# Altium PCB Hub.PcbDoc
Units mil, origin at the board's own origin, x right, y up, seen from the top; angles counter-clockwise.
Board outline 6000 x 4000 mil, 2 copper layers (Top Layer, Bottom Layer); 63 components, 68 nets, 322 pads, 0 vias.
Unrouted connection lines stored in the file: 121.
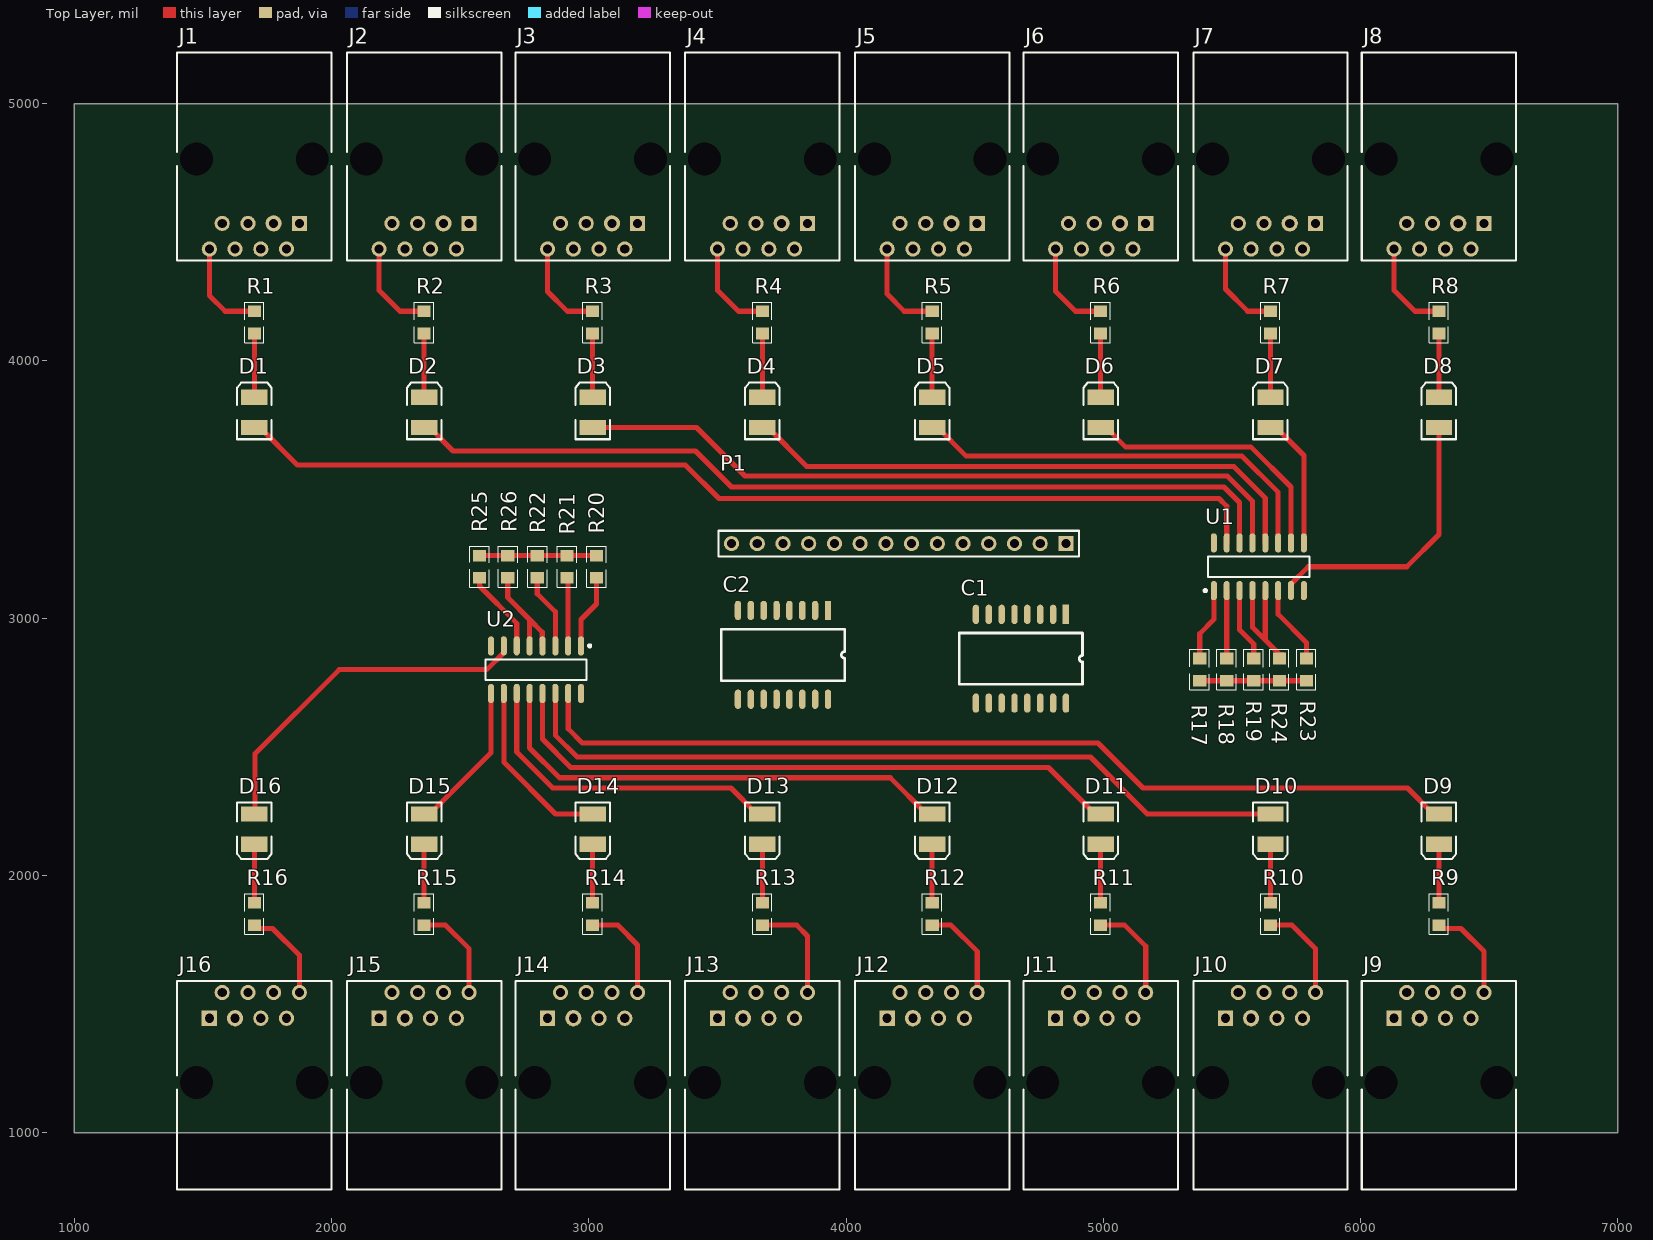
[diagram p0: Top Layer view]
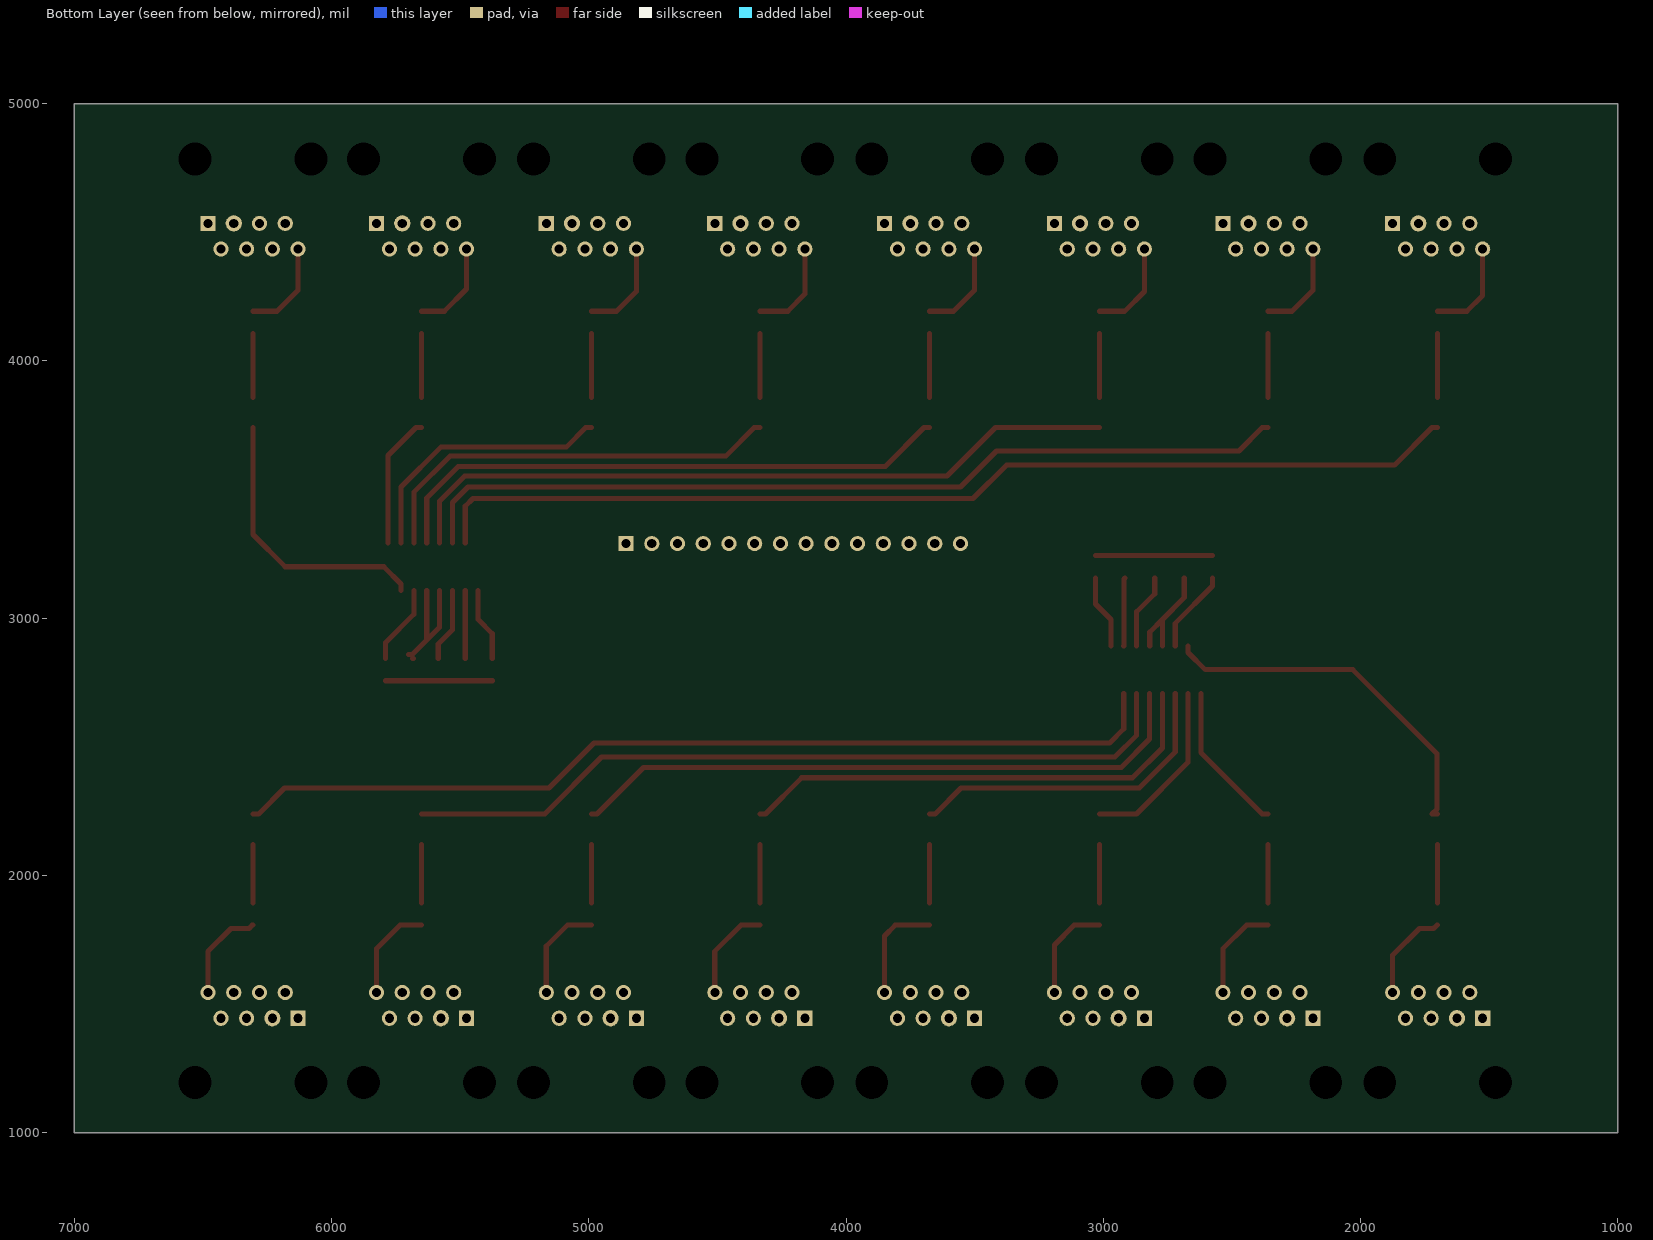
[diagram p1: Bottom Layer view, seen from below]

## Layer stack, top to bottom
Top Solder: solder mask 0.4, Solder Resist, Dk 3.5
Top Layer: signal copper 1.4
Dielectric 1: dielectric 12.6, FR-4, Dk 4.8
Bottom Layer: signal copper 1.4
Bottom Solder: solder mask 0.4, Solder Resist, Dk 3.5

## Board outline
1000,1000 7000,1000 7000,5000 1000,5000

## Design rules (kind name [scope] priority, off if disabled: settings)
Clearance [All] p1: gap=10 ignorepadtopadclearanceinfootprint=FALSE except(0: Arc-Hole Track-Hole SMDPad-Hole THPad-Hole Via-Hole Fill-Hole Poly-Hole Region-Hole Text-Hole)
PolygonConnect [All] p1: connectstyle=Relief reliefconductorwidth=10 reliefentries=4 polygonreliefangle="90 Angle" airgapwidth=10
RoutingVias [All] p1: holewidth=28 width=50 viastyle="Through Hole" minholewidth=28 minwidth=50 maxholewidth=28 maxwidth=50
SolderMaskExpansion [All] p1: expansion=4
Width [All] p1: maxlimit=20 minlimit=15 preferedwidth=20 minimp=50.000000 maximp=50.000000 favimp=50.000000
30 further rules are at their usual default settings.

## Components (designator, comment, footprint, x,y, rotation, side; value= is the part's Value field where it differs from the comment)
C1 "MAX3045" SOP16 4855,3015 r270 top
C2 "MAX3095" SOP16 3930,3030 r270 top
D1 "LED" 3.5X2.8X1.9 1700,3800 r90 top
D2 "LED" 3.5X2.8X1.9 2360,3800 r90 top
D3 "LED" 3.5X2.8X1.9 3015,3800 r90 top
D4 "LED" 3.5X2.8X1.9 3675,3800 r90 top
D5 "LED" 3.5X2.8X1.9 4335,3800 r90 top
D6 "LED" 3.5X2.8X1.9 4990,3800 r90 top
D7 "LED" 3.5X2.8X1.9 5650,3800 r90 top
D8 "LED" 3.5X2.8X1.9 6305,3800 r90 top
D9 "LED" 3.5X2.8X1.9 6305,2180 r270 top
D10 "LED" 3.5X2.8X1.9 5650,2180 r270 top
D11 "LED" 3.5X2.8X1.9 4990,2180 r270 top
D12 "LED" 3.5X2.8X1.9 4335,2180 r270 top
D13 "LED" 3.5X2.8X1.9 3675,2180 r270 top
D14 "LED" 3.5X2.8X1.9 3015,2180 r270 top
D15 "LED" 3.5X2.8X1.9 2360,2180 r270 top
D16 "LED" 3.5X2.8X1.9 1700,2180 r270 top
J1 "15-43-6233" 15-43-6233 1700,5200 r180 top
J2 "15-43-6233" 15-43-6233 2360,5200 r180 top
J3 "15-43-6233" 15-43-6233 3015,5200 r180 top
J4 "15-43-6233" 15-43-6233 3675,5200 r180 top
J5 "15-43-6233" 15-43-6233 4335,5200 r180 top
J6 "15-43-6233" 15-43-6233 4990,5200 r180 top
J7 "15-43-6233" 15-43-6233 5650,5200 r180 top
J8 "15-43-6233" 15-43-6233 6305,5200 r180 top
J9 "15-43-6233" 15-43-6233 6305,780 r0 top
J10 "15-43-6233" 15-43-6233 5650,780 r0 top
J11 "15-43-6233" 15-43-6233 4990,780 r0 top
J12 "15-43-6233" 15-43-6233 4335,780 r0 top
J13 "15-43-6233" 15-43-6233 3675,780 r0 top
J14 "15-43-6233" 15-43-6233 3015,780 r0 top
J15 "15-43-6233" 15-43-6233 2360,780 r0 top
J16 "15-43-6233" 15-43-6233 1700,780 r0 top
P1 "Header 7X2" HDR1X14 4855,3290 r180 top
R1 "0.33k" R0805 1700,4150 r90 top
R2 "0.33k" R0805 2360,4150 r90 top
R3 "0.33k" R0805 3015,4150 r90 top
R4 "0.33k" R0805 3675,4150 r90 top
R5 "0.33k" R0805 4335,4150 r90 top
R6 "0.33k" R0805 4990,4150 r90 top
R7 "0.33k" R0805 5650,4150 r90 top
R8 "0.33k" R0805 6305,4150 r90 top
R9 "0.33k" R0805 6305,1850 r90 top
R10 "0.33k" R0805 5650,1850 r90 top
R11 "0.33k" R0805 4990,1850 r90 top
R12 "0.33k" R0805 4335,1850 r90 top
R13 "0.33k" R0805 3675,1850 r90 top
R14 "0.33k" R0805 3015,1850 r90 top
R15 "0.33k" R0805 2360,1850 r90 top
R16 "0.33k" R0805 1700,1850 r90 top
R17 "4.7k" R0805 5375,2800 r90 top
R18 "4.7k" R0805 5480,2800 r90 top
R19 "4.7k" R0805 5585,2800 r90 top
R20 "4.7k" R0805 3030,3200 r270 top
R21 "4.7k" R0805 2915,3200 r270 top
R22 "4.7k" R0805 2800,3200 r270 top
R23 "4.7k" R0805 5790,2800 r90 top
R24 "4.7k" R0805 5685,2800 r90 top
R25 "4.7k" R0805 2575,3200 r270 top
R26 "4.7k" R0805 2685,3200 r270 top
U1 "MC74HC138AD" 751B-03_L 5605,3200 r90 top
U2 "MC74HC138AD" 751B-03_L 2795,2800 r270 top

## Footprints (in the part's own frame and the unit in brackets; to place one, negate y for a bottom-side part, rotate by r counter-clockwise, add the part's x,y. Pads: shape width x height; smd on the part's side, far side on the other; paste and mask are expansions set on the pad)
3.5X2.8X1.9 [mm] "SM LED; 2 C-Bend Leads; Body 3.5 x 2.8 x 1.9 mm, inc leads (LxWxH typ)"
  rect 1.5x2.6 smd: 1(-1.5,0) 2(1.5,0)
  silkscreen extent -2.65,-1.7 2.95,1.7
15-43-6233 [mm] "Connector; PCB Jack, Thru-Hole; 1-Port; Unshielded without Lightpipes; Right Angle"
  rect 1.5x1.5 hole 0.9: 1(-4.445,16.89)
  round 1.5 hole 0.9: 2(-3.175,19.43) 4(-0.635,19.43) 5(0.635,16.89) 6(1.905,19.43) 7(3.175,16.89) 8(4.445,19.43)
  round 1.6 hole 0.9: 3(-1.905,16.89)
  round 2.95 hole 3.25 unplated: MH1(-5.715,10.54) MH2(5.715,10.54)
  silkscreen extent -7.62,0 7.62,20.58
751B-03_L [mm] "SOIC, 16-Leads, Body 9.9x3.9mm, Pitch 1.27mm, IPC High Density"
  oval 1.9x0.6 smd: 1(-2.35,4.445) 2(-2.35,3.175) 3(-2.35,1.905) 4(-2.35,0.635) 5(-2.35,-0.635) 6(-2.35,-1.905) 7(-2.35,-3.175) 8(-2.35,-4.445) 9(2.35,-4.445) 10(2.35,-3.175) 11(2.35,-1.905) 12(2.35,-0.635) 13(2.35,0.635) 14(2.35,1.905) 15(2.35,3.175) 16(2.35,4.445)
  silkscreen extent -2.47,-5 1,5.42, body extent -1.95,-4.95 1.95,4.95, height 1.75
HDR1X14 [mm] "Connector; Header; 14 Position"
  rect 1.5x1.5 hole 0.9: 1(0,0)
  round 1.5 hole 0.9: 2(2.54,0) 3(5.08,0) 4(7.62,0) 5(10.16,0) 6(12.7,0) 7(15.24,0) 8(17.78,0) 9(20.32,0) 10(22.86,0) 11(25.4,0) 12(27.94,0) 13(30.48,0) 14(33.02,0)
  silkscreen extent -1.27,-1.27 34.29,1.27
R0805 [mm]
  rect 1.15x1.3 smd: 1(-1.1,0) 2(1.1,0)
  silkscreen extent -2.01,-0.94 2.01,0.97, body extent -1,-0.61 1,0.6, height 0.5
SOP16 [mil]
  rect 75x25 smd: 1(0,0)
  oval 75x25 smd: 2(0,-50) 3(0,-100) 4(0,-150) 5(0,-200) 6(0,-250) 7(0,-300) 8(0,-350) 9(345,-350) 10(345,-300) 11(345,-250) 12(345,-200) 13(345,-150) 14(345,-100) 15(345,-50) 16(345,0)
  silkscreen extent 72,-414 273,64

## Part data
D1 D2 D3 D4 D5 D6 D7 D8 D9 D10 D11 D12 D13 D14 D15 D16: library part LED3, "Typical BLUE SiC LED", DatasheetVersion=16-Apr-2002, LatestRevisionDate=17-Dec-2003, LatestRevisionNote="PCB Footprint replaced.", PackageDescription="SM LED; 2 C-Bend Leads; Body 3.5 x 2.8 x 1.9 mm, inc leads (LxWxH typ)", PackageReference=3.5X2.8X1.9, PackageVersion=16-Apr-2002, Published=8-Jun-2000, Publisher="Altium Limited"
J1 J2 J3 J4 J5 J6 J7 J8 J9 J10 J11 J12 J13 J14 J15 J16: "Right Angle, Standard Profile, RJ45-Keyed, Flange Mount PCB Jack", PackageDocument=18-Dec-2001, ComponentAvailability=Obsolete, ComponentLink1Description="Manufacturer Link", ComponentLink1URL=http://www.molex.com/, ComponentLink2Description=Datasheet, ComponentLink2URL=http://www.molex.com/cmc_upload/common_files/1212003_catalogmx41314.pdf, ComponentLink3Description="Iges Model", ComponentLink3URL=http://www.molex.com/pdm_docs/igs/15-43-6233_igs.zip, DatasheetDocument=18-Dec-2001, DrillSize="Nominal, Rounded to nearest 0.05mm", PackageReference=15-43-6233, PCB_Layout="Complies with Manufacturer's Recommendation.", PCB_Mounting=Thru-Hole, PerformanceCategory=3, Ports=1, Positions/Loaded="Port1 - 8 Keyed/8", Published=25-Jun-2002, Publisher="Altium Limited"
P1: "Header, 7-Pin, Dual row", LatestRevisionDate=17-Jul-2002, LatestRevisionNote="Re-released for DXP Platform.", Publisher="Altium Limited"
R1 R2 R3 R4 R5 R6 R7 R8 R9 R10 R11 R12 R13 R14 R15 R16 R17 R18 R19 R20 R21 R22 R23 R24 R25 R26: library part Resistance
U1 U2: "1-of-8 Decoder/Demultiplexer", Code_IPC=SOIC127P600-16, Code_JEDEC=MS-012-AC, ComponentLink1Description="Manufacturer Link", ComponentLink1URL=http://www.onsemi.com/site/products/parametrics/0,4446,419,00.html, ComponentLink2Description=Datasheet, ComponentLink2URL=http://www.onsemi.com/pub/Collateral/MC74HC138A-D.PDF, DatasheetVersion=1989, LatestRevisionDate=13-Apr-2006, LatestRevisionNote="IPC-7351 Footprint Added.", PackageDescription="16-Pin Small Outline Integrated Circuit 1.27 mm Pitch", PackageReference=751B-03, PackageVersion=1991, Published=17-Jul-2002, Publisher="Altium Limited"

## Nets (pads, with @x,y where several pads share a name; then routed paths per layer and width w, separated by ;. In a path a pad name is that pad's centre, name@x,y a point inside that pad or via, vN(x,y) a via of type N, cw(c..) or ccw(c..) an arc to the next point about the centre after c; other vN are vias at no path point)
+5: C1.4 C1.16 C2.4 C2.16 P1.2 R17.1 R18.1 R19.1 R20.1 R21.1 R22.1 R23.1 R24.1 R25.1 R26.1 U1.16 U2.16 | length 870
  Top Layer w20: R25.1 R26.1 R22.1 R21.1 R20.1 ; R17.1 R18.1 R19.1 R24.1 R23.1
EN: P1.6 R24.2 R26.2 U1.4 U1.5 U2.4 U2.5 | length 925.2
  Top Layer w20: R26.2 2685,3080 2770,2995 ; U2.5 2770,2995 ; U2.4 2819.31,2893.21 2819.31,2945.69 2770,2995 ; U1.4 5580,2965 5630,2915 ; U1.5 5630,2915 ; R24.2@5682.05,2843.31 R24.2 ; R24.2@5700.85,2859.15 5685.85,2859.15 5630,2915
EN1: P1.7 R23.2 U1.6 | length 309.7
  Top Layer w20: U1.6 5680,3015 5790,2905 R23.2
EN2: P1.8 R25.2 U2.6 | length 324.2
  Top Layer w20: R25.2 2575,3125 2720,2980 U2.6
GND: C1.8 C2.8 P1.4 U1.8 U2.8
MISO: C2.2 J1.4 J2.4 J3.4 J4.4 J5.4 J6.4 J7.4 J8.4 J9.4 J10.4 J11.4 J12.4 J13.4 J14.4 J15.4 J16.4
MISO+: C2.1 J1.3 J2.3 J3.3 J4.3 J5.3 J6.3 J7.3 J8.3 J9.3 J10.3 J11.3 J12.3 J13.3 J14.3 J15.3 J16.3
MOSI: C1.2 J1.2 J2.2 J3.2 J4.2 J5.2 J6.2 J7.2 J8.2 J9.2 J10.2 J11.2 J12.2 J13.2 J14.2 J15.2 J16.2
MOSI+: C1.3 J1.1 J2.1 J3.1 J4.1 J5.1 J6.1 J7.1 J8.1 J9.1 J10.1 J11.1 J12.1 J13.1 J14.1 J15.1 J16.1
NetC1_1: C1.1 P1.1
NetC1_7: C1.7 P1.5
NetC2_3: C2.3 P1.3
NetD1_2: D1.2 R1.1 | length 247.6
  Top Layer w20: D1.2 R1.1
NetD2_2: D2.2 R2.1 | length 247.6
  Top Layer w20: D2.2 R2.1
NetD3_2: D3.2 R3.1 | length 247.6
  Top Layer w20: D3.2 R3.1
NetD4_2: D4.2 R4.1 | length 247.6
  Top Layer w20: D4.2 R4.1
NetD5_2: D5.2 R5.1 | length 247.6
  Top Layer w20: D5.2 R5.1
NetD6_2: D6.2 R6.1 | length 247.6
  Top Layer w20: D6.2 R6.1
NetD7_2: D7.2 R7.1 | length 247.6
  Top Layer w20: D7.2 R7.1
NetD8_2: D8.2 R8.1 | length 247.6
  Top Layer w20: D8.2 R8.1
NetD9_2: D9.2 R9.2 | length 227.6
  Top Layer w20: R9.2 D9.2
NetD10_2: D10.2 R10.2 | length 227.6
  Top Layer w20: R10.2 D10.2
NetD11_2: D11.2 R11.2 | length 227.6
  Top Layer w20: R11.2 D11.2
NetD12_2: D12.2 R12.2 | length 227.6
  Top Layer w20: R12.2 D12.2
NetD13_2: D13.2 R13.2 | length 227.6
  Top Layer w20: R13.2 D13.2
NetD14_2: D14.2 R14.2 | length 227.6
  Top Layer w20: R14.2 D14.2
NetD15_2: D15.2 R15.2 | length 227.6
  Top Layer w20: R15.2 D15.2
NetD16_2: D16.2 R16.2 | length 227.6
  Top Layer w20: R16.2 D16.2
NetJ1_8: J1.8 R1.2 | length 380.6
  Top Layer w20: J1.8 1525,4255 1586.69,4193.31 R1.2
NetJ2_8: J2.8 R2.2 | length 368.9
  Top Layer w20: J2.8 2185,4275 2266.69,4193.31 R2.2
NetJ3_8: J3.8 R3.2 | length 371.8
  Top Layer w20: J3.8 2840,4270 2916.69,4193.31 R3.2
NetJ4_8: J4.8 R4.2 | length 368.9
  Top Layer w20: J4.8 3500,4275 3581.69,4193.31 R4.2
NetJ5_8: J5.8 R5.2 | length 377.7
  Top Layer w20: J5.8 4160,4260 4226.69,4193.31 R5.2
NetJ6_8: J6.8 R6.2 | length 371.8
  Top Layer w20: J6.8 4815,4270 4891.69,4193.31 R6.2
NetJ7_8: J7.8 R7.2 | length 365.9
  Top Layer w20: J7.8 5475,4280 5561.69,4193.31 R7.2
NetJ8_8: J8.8 R8.2 | length 368.9
  Top Layer w20: J8.8 6130,4275 6211.69,4193.31 R8.2
NetJ9_8: J9.8 R9.1 | length 377.2
  Top Layer w20: R9.1 6307.95,1806.69 6320.59,1794.06 6390.94,1794.06 6480,1705 J9.8
NetJ10_8: J10.8 R10.1 | length 383
  Top Layer w20: R10.1 5733.31,1806.69 5825,1715 J10.8
NetJ11_8: J11.8 R11.1 | length 388.9
  Top Layer w20: R11.1 5083.31,1806.69 5165,1725 J11.8
NetJ12_8: J12.8 R12.1 | length 377.2
  Top Layer w20: R12.1 4408.31,1806.69 4510,1705 J12.8
NetJ13_8: J13.8 R13.1 | length 412.3
  Top Layer w20: R13.1 3808.31,1806.69 3850,1765 J13.8
NetJ14_8: J14.8 R14.1 | length 391.8
  Top Layer w20: R14.1 3113.31,1806.69 3190,1730 J14.8
NetJ15_8: J15.8 R15.1 | length 383
  Top Layer w20: R15.1 2443.31,1806.69 2535,1715 J15.8
NetJ16_8: J16.8 R16.1 | length 368.4
  Top Layer w20: R16.1 1702.95,1806.69 1715.59,1794.06 1770.94,1794.06 1875,1690 J16.8
p1: D1.1 U1.15 | length 4049.2
  Top Layer w20: D1.1 1721.65,3740.94 1867.6,3595 3376.56,3595 3506.56,3465 5450,3465 5480,3435 U1.15
p2: D2.1 U1.14 | length 3448
  Top Layer w20: D2.1 2381.65,3740.94 2472.6,3650 3415,3650 3555,3510 5470,3510 5530,3450 U1.14
p3: D3.1 U1.13 | length 2845.9
  Top Layer w20: D3.1 3419.06,3740.94 3607.5,3552.5 5482.5,3552.5 5580,3455 U1.13
p4: D4.1 U1.12 | length 2243.2
  Top Layer w20: D4.1 3696.65,3740.94 3847.6,3590 5507.5,3590 5630,3467.5 U1.12
p5: D5.1 U1.11 | length 1646.4
  Top Layer w20: D5.1 4356.65,3740.94 4467.6,3630 5540,3630 5680,3490 U1.11
p6: D6.1 U1.10 | length 1053.1
  Top Layer w20: D6.1 5011.65,3740.94 5087.6,3665 5575,3665 5730,3510 U1.10
p7: D7.1 U1.9 | length 515
  Top Layer w20: D7.1 5671.65,3740.94 5780,3632.6 U1.9
p8: D8.1 U1.7 | length 1096
  Top Layer w20: U1.7 5730,3133.07 5796.93,3200 6180,3200 6305,3325 D8.1
p9: D9.1 U2.15 | length 3659.6
  Top Layer w20: U2.15 2920,2570 2975,2515 4980,2515 5155,2340 6182.4,2340 6283.35,2239.06 D9.1
p10: D10.1 U2.14 | length 3069.2
  Top Layer w20: U2.14 2870,2545 2955,2460 4950,2460 5170.94,2239.06 D10.1
p11: D11.1 U2.13 | length 2468
  Top Layer w20: U2.13 2820,2530 2930,2420 4787.4,2420 4968.35,2239.06 D11.1
p12: D12.1 U2.12 | length 1882.9
  Top Layer w20: U2.12 2770,2495.94 2885.94,2380 4172.4,2380 4313.35,2239.06 D12.1
p13: D13.1 U2.11 | length 1282.3
  Top Layer w20: U2.11 2720,2480 2860,2340 3552.4,2340 3653.35,2239.06 D13.1
p14: D14.1 U2.10 | length 695.7
  Top Layer w20: U2.10 2670,2440 2870.94,2239.06 D14.1
p15: D15.1 U2.9 | length 588.8
  Top Layer w20: D15.1 2381.65,2239.06 2620,2477.4 U2.9
p16: D16.1 U2.7 | length 1419.1
  Top Layer w20: D16.1 1721.65,2239.06 1702.95,2257.76 1702.95,2472.95 2030,2800 2603.07,2800 2670,2866.93 U2.7
SCLK: C1.6 J1.6 J2.6 J3.6 J4.6 J5.6 J6.6 J7.6 J8.6 J9.6 J10.6 J11.6 J12.6 J13.6 J14.6 J15.6 J16.6
SCLK+: C1.5 J1.5 J2.5 J3.5 J4.5 J5.5 J6.5 J7.5 J8.5 J9.5 J10.5 J11.5 J12.5 J13.5 J14.5 J15.5 J16.5
SS1: P1.13 R17.2 U1.1 | length 287
  Top Layer w20: R17.2 5375,2940 5430,2995 U1.1
SS2: P1.11 R18.2 U1.2 | length 264.2
  Top Layer w20: R18.2 U1.2
SS3: P1.9 R19.2 U1.3 | length 287
  Top Layer w20: U1.3 5530,2955 5585,2900 R19.2
SS4: P1.10 R20.2 U2.1 | length 289
  Top Layer w20: U2.1 2970,2995 3030,3055 R20.2
SS5: P1.12 R21.2 U2.2 | length 266.2
  Top Layer w20: R21.2 2919.31,3152.39 2919.31,2893.21 U2.2
SS6: P1.14 R22.2 U2.3 | length 293.2
  Top Layer w20: R22.2 2800,3095 2870,3025 U2.3
pads on no net: C1.9 C1.10 C1.11 C1.12 C1.13 C1.14 C1.15 C2.5 C2.6 C2.7 C2.9 C2.10 C2.11 C2.12 C2.13 C2.14 C2.15 J1.7 J1.MH1 J1.MH2 J2.7 J2.MH1 J2.MH2 J3.7 J3.MH1 J3.MH2 J4.7 J4.MH1 J4.MH2 J5.7 J5.MH1 J5.MH2 J6.7 J6.MH1 J6.MH2 J7.7 J7.MH1 J7.MH2 J8.7 J8.MH1 J8.MH2 J9.7 J9.MH1 J9.MH2 J10.7 J10.MH1 J10.MH2 J11.7 J11.MH1 J11.MH2 J12.7 J12.MH1 J12.MH2 J13.7 J13.MH1 J13.MH2 J14.7 J14.MH1 J14.MH2 J15.7 J15.MH1 J15.MH2 J16.7 J16.MH1 J16.MH2